# Altium PCB PCB-OEE-Test.PcbDoc
Units mm, origin at the board's own origin, x right, y up, seen from the top; angles counter-clockwise.
Board outline 152.4 x 101.6 mm, 2 copper layers (Top Layer, Bottom Layer); 56 components, 41 nets, 164 pads, 0 vias.
Unrouted connection lines stored in the file: 4.
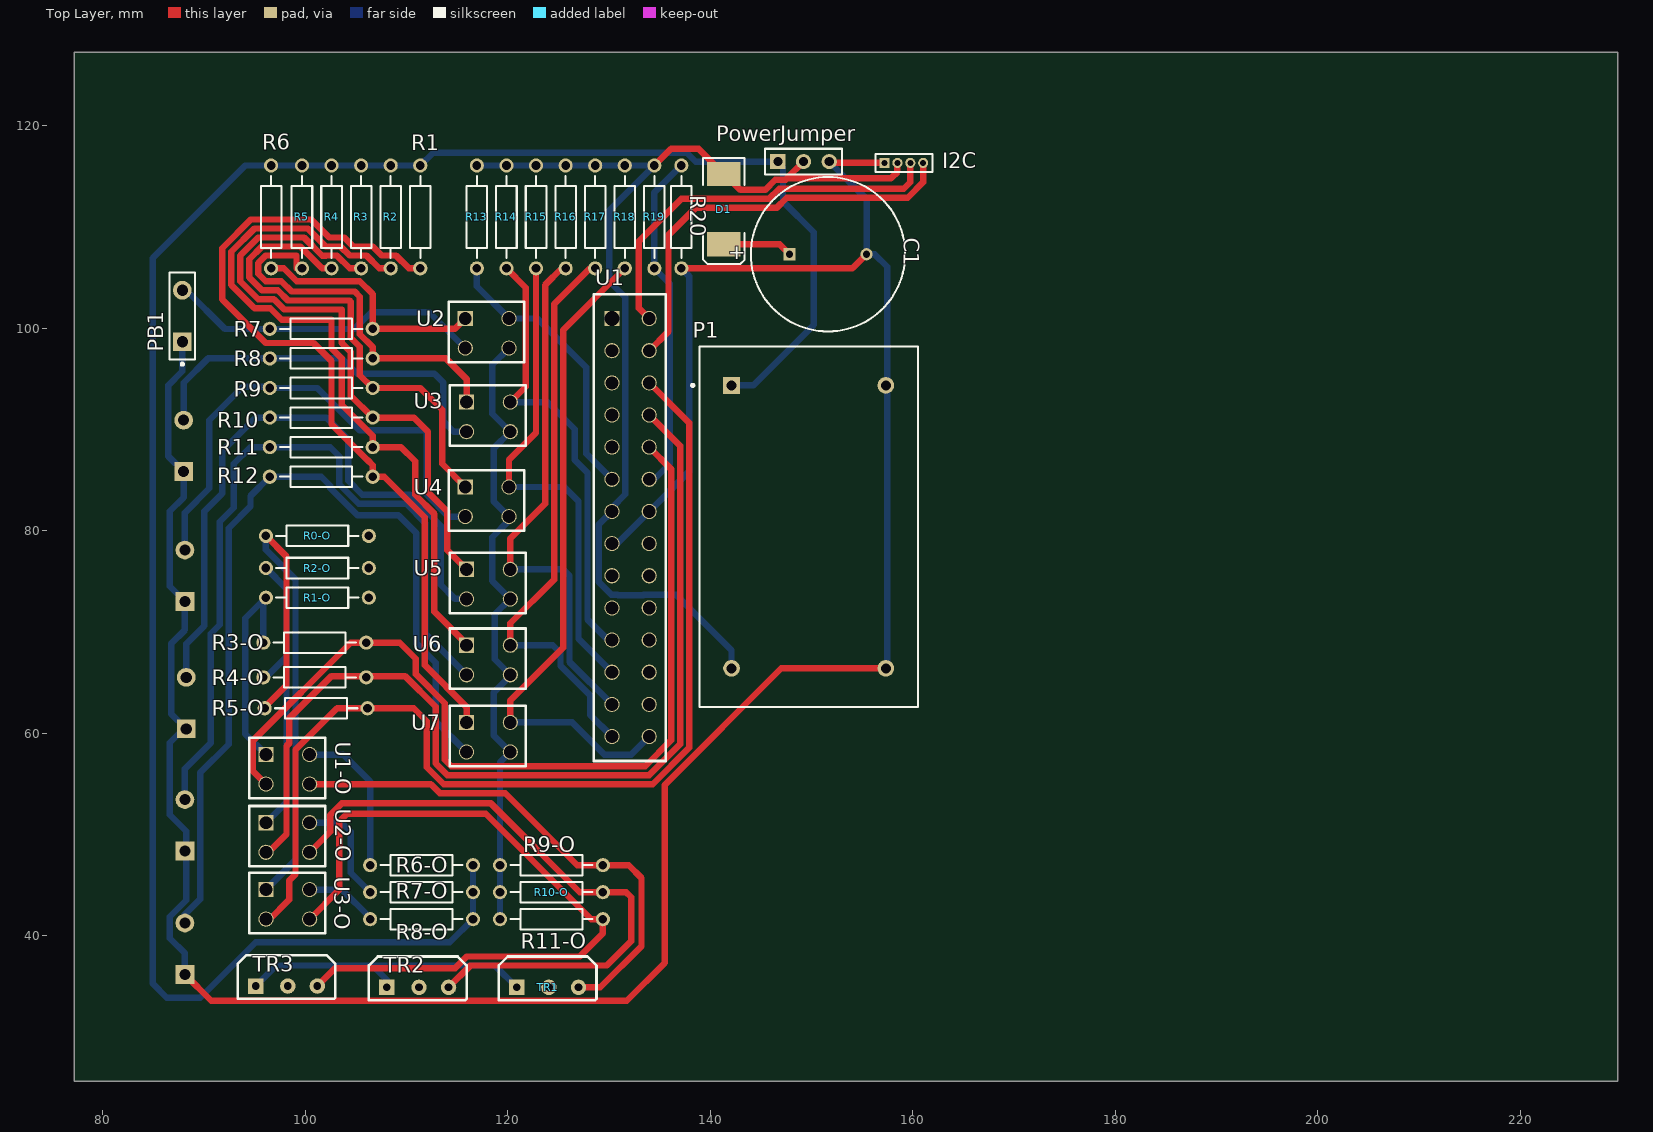
[diagram p0: Top Layer view]
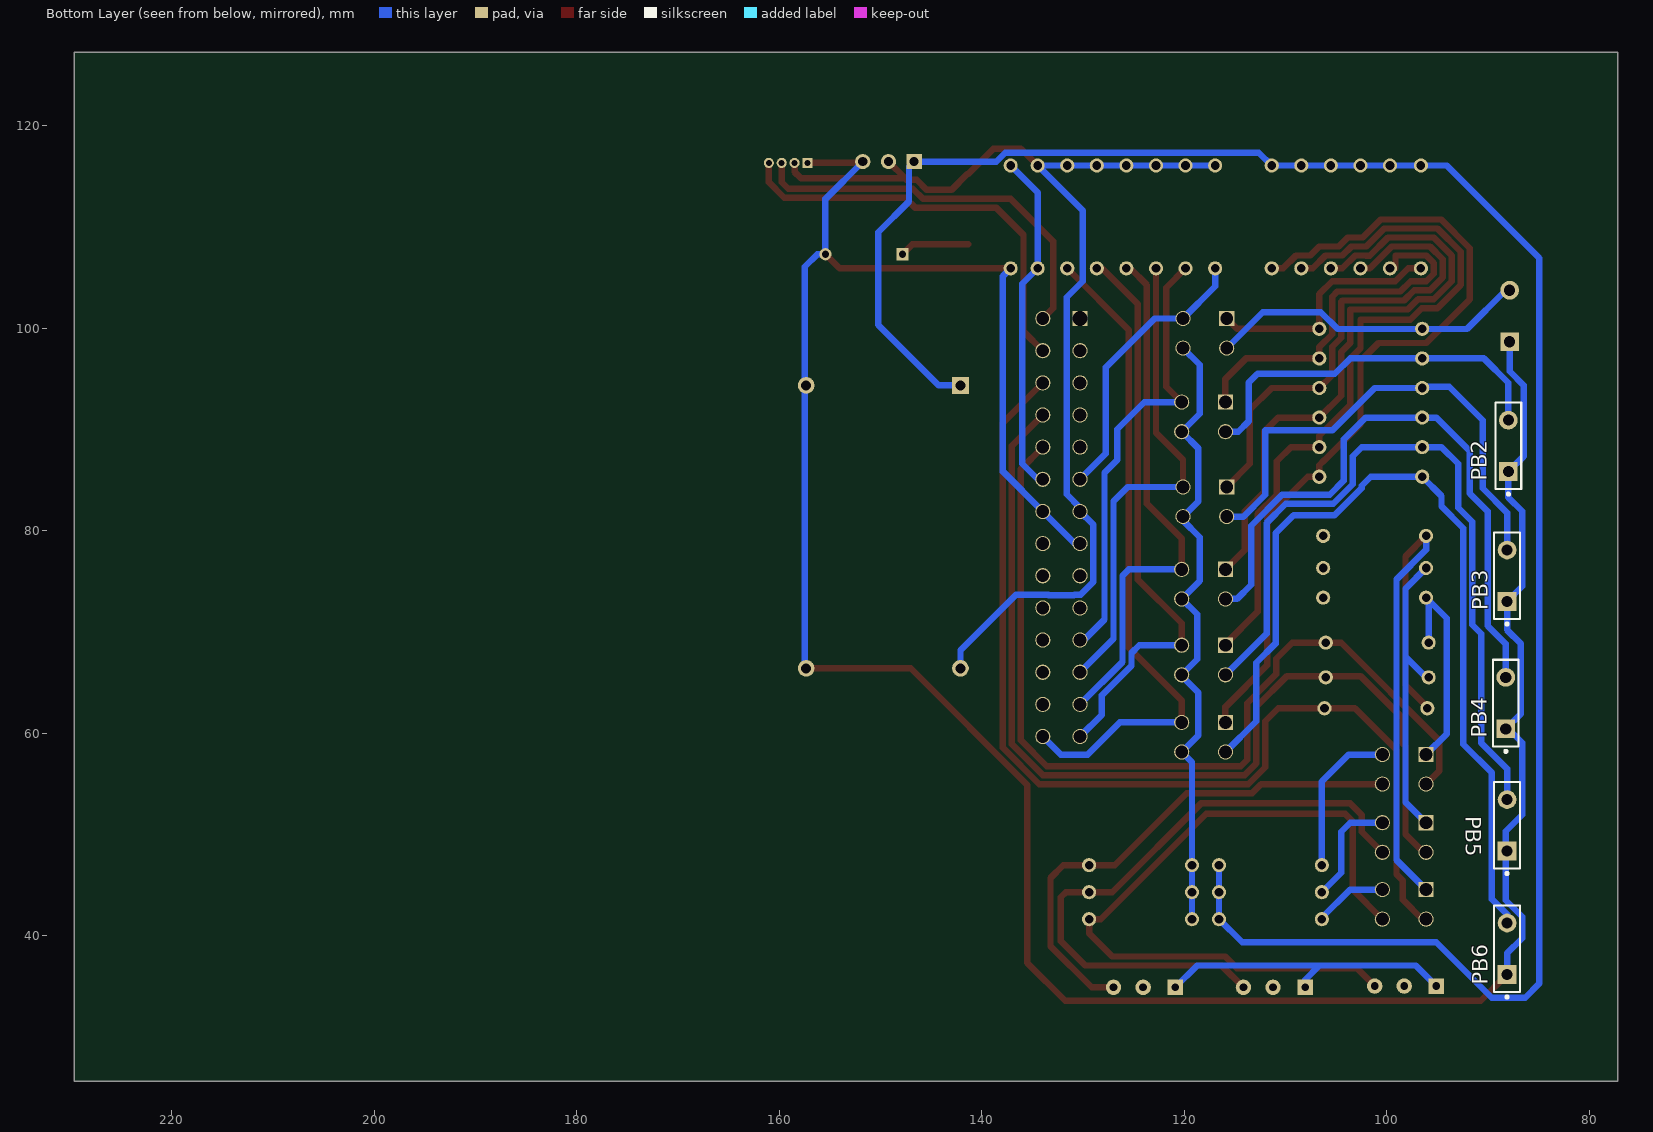
[diagram p1: Bottom Layer view, seen from below]

## Layer stack, top to bottom
Top Solder: solder mask 0.0102, Solder Resist, Dk 3.5
Top Layer: signal copper 0.0356
Dielectric 1: dielectric 0.32, FR-4, Dk 4.8
Bottom Layer: signal copper 0.0356
Bottom Solder: solder mask 0.0102, Solder Resist, Dk 3.5

## Board outline
77.216,25.654 229.616,25.654 229.616,127.254 77.216,127.254

## Design rules (kind name [scope] priority, off if disabled: settings)
Clearance [All] p1: gap=0.254
PolygonConnect [All] p1: connectstyle=Relief reliefconductorwidth=0.254 reliefentries=4 polygonreliefangle="90 Angle" airgapwidth=0.254
RoutingVias [All] p1: holewidth=0.711 width=1.27 viastyle="Through Hole" minholewidth=0.711 minwidth=1.27 maxholewidth=0.711 maxwidth=1.27
SolderMaskExpansion [All] p1: expansion=0.102
Width [All] p1: maxlimit=0.635 minlimit=0.635 preferedwidth=0.635 minimp=50.000000 maximp=50.000000 favimp=50.000000
30 further rules are at their usual default settings.

## Components (designator, comment, footprint, x,y, rotation, side; value= is the part's Value field where it differs from the comment)
C1 "p Pol1" RB7.6-15 151.638,107.315 r180 top
D1 "Diode" SMC 141.351,111.76 r270 top
I2C "LCD-I2C" MHDR1X4 157.226,116.332 r0 top (schematic designator U99)
P1 "StepDown" MODULE4 149.733,80.391 r270 top
PB1 "NG+" SPST-2 87.884,101.219 r90 top
PB2 "NG+" SPST-2 88.011,88.392 r90 bottom
PB3 "NG+" SPST-2 88.138,75.565 r90 bottom
PB4 "NG+" SPST-2 88.265,62.992 r90 bottom
PB5 "NG+" SPST-2 88.138,50.927 r90 bottom
PB6 "NG+" SPST-2 88.138,38.735 r90 bottom
PowerJumper "POWER-J" HDR1X3 146.685,116.459 r0 top (schematic designator J1)
R0-O "Res2" AXIAL-0.4 101.219,79.502 r180 top
R1 "Res2" AXIAL-0.4 111.379,110.998 r270 top
R1-O "Res2" AXIAL-0.4 101.219,73.406 r180 top
R2 "Res2" AXIAL-0.4 108.458,110.998 r270 top
R2-O "Res2" AXIAL-0.4 101.219,76.327 r180 top
R3 "Res2" AXIAL-0.4 105.537,110.998 r270 top
R3-O "Res2" AXIAL-0.4 100.965,68.961 r0 top
R4 "Res2" AXIAL-0.4 102.616,110.998 r270 top
R4-O "Res2" AXIAL-0.4 100.965,65.532 r0 top
R5 "Res2" AXIAL-0.4 99.695,110.998 r270 top
R5-O "Res2" AXIAL-0.4 101.092,62.484 r0 top
R6 "Res2" AXIAL-0.4 96.647,110.998 r270 top
R6-O "Res2" AXIAL-0.4 111.506,46.99 r0 top
R7 "Res2" AXIAL-0.4 101.6,99.949 r0 top
R7-O "Res2" AXIAL-0.4 111.506,44.323 r0 top
R8 "Res2" AXIAL-0.4 101.6,97.028 r0 top
R8-O "Res2" AXIAL-0.4 111.506,41.656 r0 top
R9 "Res2" AXIAL-0.4 101.6,94.107 r0 top
R9-O "Res2" AXIAL-0.4 124.333,46.99 r0 top
R10 "Res2" AXIAL-0.4 101.6,91.186 r0 top
R10-O "Res2" AXIAL-0.4 124.333,44.323 r0 top
R11 "Res2" AXIAL-0.4 101.6,88.265 r0 top
R11-O "Res2" AXIAL-0.4 124.333,41.656 r0 top
R12 "Res2" AXIAL-0.4 101.6,85.344 r0 top
R13 "Res2" AXIAL-0.4 116.967,110.998 r270 top
R14 "Res2" AXIAL-0.4 119.888,110.998 r270 top
R15 "Res2" AXIAL-0.4 122.809,110.998 r270 top
R16 "Res2" AXIAL-0.4 125.73,110.998 r270 top
R17 "Res2" AXIAL-0.4 128.651,110.998 r270 top
R18 "Res2" AXIAL-0.4 131.572,110.998 r270 top
R19 "Res2" AXIAL-0.4 134.493,110.998 r270 top
R20 "Res2" AXIAL-0.4 137.16,110.998 r270 top
TR1 "BD139" BD139 122.936,33.02 r0 top
TR2 "BD139" BD139 110.109,33.02 r0 top
TR3 "BD139" BD139 97.155,33.147 r0 top
U1 "ATMEGA328" at328 123.063,106.426 r270 top
U1-O "PC817" PC817 103.124,49.53 r0 top
U2 "PC817" PC817 122.809,92.583 r0 top
U2-O "PC817" PC817 103.124,42.799 r0 top
U3 "PC817" PC817 122.936,84.328 r0 top
U3-O "PC817" PC817 103.124,36.195 r0 top
U4 "PC817" PC817 122.809,75.946 r0 top
U5 "PC817" PC817 122.936,67.818 r0 top
U6 "PC817" PC817 122.936,60.325 r0 top
U7 "PC817" PC817 122.936,52.705 r0 top

## Footprints (in the part's own frame and the unit in brackets; to place one, negate y for a bottom-side part, rotate by r counter-clockwise, add the part's x,y. Pads: shape width x height; smd on the part's side, far side on the other; paste and mask are expansions set on the pad)
at328 [mil] "atmega328p"
  rect 59.06x59.06 hole 59.06: 1(215,285)
  round 59 hole 50: 2(340,285) 3(465,285) 4(590,285) 5(715,285) 6(840,285) 7(965,285) 8(1090,285) 9(1215,285) 10(1340,285) 11(1465,285) 12(1590,285) 13(1715,285) 14(1840,285) 15(1840,430) 16(1715,430) 17(1590,430) 18(1465,430) 19(1340,430) 20(1215,430) 21(1090,430) 22(965,430) 23(840,430) 24(715,430) 25(590,430) 26(465,430) 27(340,430) 28(215,430)
  silkscreen extent 120,215 1935,495
AXIAL-0.4 [mm] "Axial Device, Thru-Hole; 2 Leads; 0.4 in Pin Spacing"
  round 1.4 hole 0.85: 1(-5.08,0) 2(5.08,0)
  silkscreen extent -4.06,-1.02 4.06,1.02
BD139 [mil] "Transistor BD139"
  rect 60x60 hole 30: 1(-80,75)
  round 60 hole 30: 2(45,75) 3(160,75)
  silkscreen extent -150,25 230,195
HDR1X3 [mm] "Connector; Header; 3 Position"
  rect 1.5x1.5 hole 0.9: 1(0,0)
  round 1.5 hole 0.9: 2(2.54,0) 3(5.08,0)
  silkscreen extent -1.27,-1.27 6.35,1.27
MHDR1X4 [mm] "Connector; Header; 4 Position"
  rect 1x1 hole 0.6: 1(0,0)
  round 1 hole 0.6: 2(1.27,0) 3(2.54,0) 4(3.81,0)
  silkscreen extent -0.9,-0.9 4.71,0.9
MODULE4 [mm] "DIP; 4 Round Pins; Row Space 27.94 mm; Pitch 15.24 mm"
  rect 1.65x1.65 hole 1: 1(-13.97,-7.62)
  round 1.65 hole 1: 2(-13.97,7.62) 3(13.97,-7.62) 4(13.97,7.62)
  silkscreen extent -17.8,-11.57 17.8,10.8, body extent -17.8,-10.8 17.8,10.8, height 14
PC817 [mil] "Optocoupler PC817-4p"
  rect 59x59 hole 50: 1(-275,330)
  round 59 hole 50: 2(-275,215) 3(-105,330) 4(-105,215)
  silkscreen extent -340,160 -45,395
RB7.6-15 [mm] "Polarized Capacitor (Radial); 2 Leads"
  rect 1.2x1.2 hole 0.7: 1(3.81,0)
  round 1.2 hole 0.7: 2(-3.81,0)
  silkscreen extent -7.62,-7.62 7.62,7.62
SMC [mm] "DO-214-AB/SMC; 2 C-Bend Leads; Body 7.9 x 5.9 mm, inc. leads (LxW)"
  rect 2.4x3.3 smd: 1(-3.475,0) 2(3.475,0)
  silkscreen extent -5.07,-2.05 5.43,2.05
SPST-2 [mm] "Switch; 2 Leads"
  rect 1.85x1.85 hole 1.1: 1(-2.54,0)
  round 1.85 hole 1.1: 2(2.54,0)
  silkscreen extent -4.89,-1.27 4.28,1.27

## Part data
C1: library part "Cap Pol1", "Polarized Capacitor (Radial)"
D1: "Default Diode"
I2C: library part I2C
PB1 PB2 PB3 PB4 PB5 PB6: library part SW-PB, "Switch"
PowerJumper: library part "Header 3", "Header, 3-Pin"
R0-O R1 R1-O R2 R2-O R3 R3-O R4 R4-O R5 R5-O R6 R6-O R7 R7-O R8 R8-O R9 R9-O R10 R10-O R11 R11-O R12 R13 R14 R15 R16 R17 R18 R19 R20: "Resistor"
TR1 TR2 TR3: library part 2N3904, "NPN General Purpose Amplifier"

## Nets (pads, with @x,y where several pads share a name; then routed paths per layer and width w, separated by ;. In a path a pad name is that pad's centre, name@x,y a point inside that pad or via, vN(x,y) a via of type N, cw(c..) or ccw(c..) an arc to the next point about the centre after c; other vN are vias at no path point)
+3V3: R0-O.1 R1-O.1 R2-O.1
+5V: D1.1 I2C.2 P1.3 PowerJumper.2 R13.1 R14.1 R15.1 R16.1 R17.1 R18.1 R19.1 U1.7 | length 110.3
  Top Layer w0.635: R19.1 136.144,117.729 138.857,117.729 D1.1 141.432,115.235 143.002,113.665 145.428,113.665 146.444,114.681 147.447,114.681 147.574,114.808 ; PowerJumper.2 147.574,114.808 ; I2C.2 158.496,115.443 157.861,114.808 147.574,114.808
  Bottom Layer w0.635: R13.1 R14.1 R15.1 R16.1 R17.1 R18.1 R19.1 130.048,111.633 130.048,104.648 131.624,103.072 131.624,83.618 130.302,82.296 U1.7 128.981,80.594 128.981,74.967 130.238,73.711 130.849,73.711 130.9,73.66 133.387,73.66 133.438,73.711 136.601,73.711 142.113,68.199 P1.3
+24V: P1.1 PowerJumper.1 R1.1 R2.1 R3.1 R4.1 R5.1 R6-O.2 R6.1 R7-O.2 R8-O.2 | length 207
  Bottom Layer w0.635: R6-O.2 R7-O.2 R8-O.2 114.3,39.37 95.123,39.37 89.662,33.909 86.36,33.909 84.963,35.306 84.963,106.934 94.107,116.078 R6.1 R5.1 R4.1 R3.1 R2.1 R1.1 112.651,117.35 137.687,117.35 138.577,116.459 PowerJumper.1 147.193,115.951 147.193,112.522 150.241,109.474 150.241,100.33 144.272,94.361 P1.1
A0: R19.2 R20.1 U1.23 | length 33.9
  Bottom Layer w0.635: U1.23 134.493,85.09 136.017,86.614 136.017,104.394 R19.2 134.493,113.411 R20.1
A1: R3-O.2 U1-O.2 U1.24 | length 90.3
  Top Layer w0.635: U1-O.2 94.818,56.312 94.818,59.258 104.521,68.961 R3-O.2 109.347,68.961 110.928,67.38 110.928,65.856 113.792,62.992 113.792,57.404 114.427,56.769 133.604,56.769 136.144,59.309 136.144,86.106 U1.24
A2: R4-O.2 U1.25 U2-O.2 | length 97
  Top Layer w0.635: U2-O.2 96.393,48.26 98.171,50.038 98.171,58.751 98.425,59.005 98.425,61.468 102.616,65.659 109.868,65.659 112.903,62.624 112.903,57.036 114.059,55.88 133.972,55.88 137.033,58.941 137.033,88.392 U1.25
A3: R5-O.2 U1.26 U3-O.2 | length 103.8
  Top Layer w0.635: U3-O.2@96.342,41.656 U3-O.2 96.52,41.656 98.425,43.561 98.425,45.454 99.06,46.089 99.06,58.383 103.161,62.484 R5-O.2 110.744,62.484 112.014,61.214 112.014,56.668 113.691,54.991 134.34,54.991 137.922,58.573 137.922,90.678 U1.26
A4: I2C.4 U1.27 | length 41.4
  Top Layer w0.635: U1.27 135.888,99.693 135.888,109.218 138.557,111.887 146.558,111.887 147.574,112.903 159.499,112.903 161.036,114.44 I2C.4
A5: I2C.3 U1.28 | length 39.2
  Top Layer w0.635: U1.28 132.969,101.981 132.969,108.585 137.16,112.776 145.796,112.776 146.812,113.792 159.131,113.792 159.766,114.427 I2C.3
D4: R13.2 U1.6 U2.3 | length 28
  Bottom Layer w0.635: R13.2 116.967,104.14 U2.3 122.936,100.965 127.762,96.139 127.762,87.63 U1.6
D5: R14.2 U1.11 U3.3 | length 44.3
  Top Layer w0.635: R14.2 121.793,104.013 121.793,94.234 U3.3
  Bottom Layer w0.635: U3.3 123.952,92.71 126.619,90.043 126.619,86.995 127.889,85.725 127.889,71.247 U1.11@129.921,69.215
D6: R15.2 U1.12 U4.3 | length 48.4
  Top Layer w0.635: U4.3 120.142,87.02 122.809,89.687 R15.2
  Bottom Layer w0.635: U4.3 125.603,84.328 127,82.931 127,69.342 U1.12
D7: R16.2 U1.13 U5.3 | length 52.7
  Top Layer w0.635: U5.3 120.269,79.248 123.698,82.677 123.698,104.267 125.349,105.918 R16.2
  Bottom Layer w0.635: U5.3 125.476,76.2 126.111,75.565 126.111,67.056 U1.13
D8: R17.2 U1.14 U6.3 | length 56.6
  Top Layer w0.635: U6.3 120.269,70.866 124.587,75.184 124.587,102.362 128.143,105.918 R17.2
  Bottom Layer w0.635: U6.3 124.46,68.707 125.222,67.945 125.222,66.688 128.143,63.767 128.143,61.849 U1.14
D9: R18.2 U1.15 U7.3 | length 65.3
  Top Layer w0.635: U7.3 120.269,63.246 125.476,68.453 125.476,99.822 R18.2
  Bottom Layer w0.635: U7.3 126.365,61.087 129.54,57.912 132.207,57.912 U1.15
GND: C1.2 I2C.1 P1.2 P1.4 PB1.1 PB2.1 PB3.1 PB4.1 PB5.1 PB6.1 PowerJumper.3 R20.2 U1.8 U1.22 | length 270.8
  Top Layer w0.635: PB6.1 90.742,33.591 131.762,33.591 135.509,37.338 135.509,54.902 147.028,66.421 P1.4 ; R20.2 154.051,105.918 C1.2 ; PowerJumper.3@151.892,116.332 I2C.1
  Bottom Layer w0.635: PB1.1 87.884,95.745 86.515,94.376 86.515,87.348 PB2.1 88.011,83.299 86.642,81.93 86.642,74.521 PB3.1 88.138,70.218 86.769,68.849 86.769,61.948 PB4.1 88.011,60.452 86.642,59.083 86.642,51.971 88.265,50.347 88.265,43.518 86.642,41.895 86.642,39.779 88.138,38.282 PB6.1 ; U1.8 130.81,78.74 U1.22 137.922,85.852 137.922,105.156 R20.2 ; PowerJumper.3 155.448,112.776 C1.2 156.239,107.315 157.48,106.074 P1.4@157.48,66.675
L1: TR1.2
L2: TR2.2
L3: R9-O.1 R10-O.1 R11-O.1 TR1.1 TR2.1 TR3.1 TR3.2 U2.4 U3.4 U4.4 U5.4 U6.4 U7.4 | length 93.8
  Bottom Layer w0.635: TR3.1 97.155,37.084 106.68,37.084 ; TR2.1 108.077,35.687 106.68,37.084 ; R11-O.1 R10-O.1 R9-O.1 119.253,57.15 U7.4 118.618,59.817 118.618,64.008 120.269,65.659 U6.4 118.745,67.31 118.745,71.755 U5.4 118.491,75.057 118.491,79.375 120.142,81.026 U4.4 118.618,82.931 118.618,88.138 U3.4 118.491,91.567 118.491,96.393 U2.4 ; TR1.1 118.745,37.084 106.68,37.084
NetC1_1: C1.1 D1.2 | length 6.9
  Top Layer w0.635: D1.2 146.858,108.285 C1.1
NetPB1_2: PB1.2 R7.1 U2.2 | length 31.3
  Bottom Layer w0.635: PB1.2@88.265,103.759 92.095,99.929 104.862,99.929 106.533,101.6 112.268,101.6 U2.2
NetPB2_2: PB2.2 R8.1 U3.2 | length 37.9
  Bottom Layer w0.635: PB2.2 88.011,94.615 90.424,97.028 103.632,97.028 105.156,95.504 112.776,95.504 113.665,94.615 113.665,90.805 114.681,89.789 U3.2
NetPB3_2: PB3.2 R9.1 U4.2 | length 49.3
  Bottom Layer w0.635: PB3.2 88.138,81.788 90.551,84.201 90.551,90.932 93.853,94.234 R9.1@96.393,94.234 ; R9.1 101.216,94.107 105.408,89.914 112.016,89.914 112.016,83.564 114.173,81.407 U4.2
NetPB4_2: PB4.2 R10.1 U5.2 | length 62.5
  Bottom Layer w0.635: PB4.2 88.265,68.834 90.043,70.612 90.043,81.915 91.821,83.693 91.821,87.884 95.123,91.186 R10.1 102.108,91.186 104.267,89.027 104.267,84.963 105.664,83.566 110.363,83.566 113.411,80.518 113.411,74.676 114.808,73.279 U5.2
NetPB5_2: PB5.2 R11.1 U6.2 | length 76.2
  Bottom Layer w0.635: PB5.2 88.138,56.515 90.678,59.055 90.678,69.85 91.567,70.739 91.567,80.899 92.964,82.296 92.964,86.614 94.615,88.265 R11.1 102.489,88.265 103.378,87.376 103.378,84.595 105.296,82.677 109.982,82.677 111.887,80.772 111.887,69.85 U6.2
NetPB6_2: PB6.2 R12.1 U7.2 | length 88.1
  Bottom Layer w0.635: PB6.2 88.138,42.134 89.634,43.631 89.634,56.106 92.456,58.928 92.456,80.264 94.615,82.423 94.615,83.439 R12.1 101.6,85.344 102.489,84.455 102.489,84.227 105.182,81.534 109.22,81.534 110.998,79.756 110.998,68.871 112.903,66.966 112.903,61.214 U7.2
NetR0-O_2: R0-O.2 R5-O.1 U3-O.1 | length 56.1
  Top Layer w0.635: R5-O.1 96.012,62.598 98.171,64.757 98.171,77.47 R0-O.2
  Bottom Layer w0.635: U3-O.1 99.06,47.498 99.06,75.204 96.139,78.125 R0-O.2
NetR1-O_2: R1-O.2 R3-O.1 U1-O.1 | length 21
  Bottom Layer w0.635: R3-O.1 95.885,73.152 94.107,71.374 94.107,59.944 U1-O.1
NetR1_2: R1.2 R12.2 U7.1 | length 83
  Top Layer w0.635: R1.2 110.256,105.918 108.985,107.19 107.567,107.19 106.678,108.079 104.768,108.079 103.879,108.968 102.405,108.968 100.627,110.746 94.647,110.746 91.819,107.918 91.819,102.851 96.119,98.552 100.838,98.552 102.616,96.774 102.616,90.531 106.153,86.993 106.174,86.993 106.68,86.487 R12.2 107.823,85.344 111.817,81.35 111.817,66.745 115.951,62.611 U7.1
NetR2-O_2: R2-O.2 R4-O.1 U2-O.1 | length 29.8
  Bottom Layer w0.635: R4-O.1 96.139,65.532 98.044,67.437 ; U2-O.1 98.171,53.213 98.171,74.295 R2-O.2
NetR2_2: R2.2 R11.2 U6.1 | length 72.1
  Top Layer w0.635: R2.2 107.335,105.918 106.064,107.19 105.01,107.19 105.009,107.188 104.401,107.188 103.511,108.079 102.037,108.079 100.259,109.857 95.016,109.857 92.708,107.549 92.708,104.285 95.014,101.979 96.56,101.979 97.701,100.838 102.614,100.838 102.614,98.044 103.63,97.028 103.63,92.437 106.68,89.388 R11.2 109.474,88.265 110.871,86.868 110.871,83.566 112.776,81.661 112.776,72.009 U6.1@115.951,68.834
NetR3_2: R3.2 R10.2 U5.1 | length 60.8
  Top Layer w0.635: R3.2 104.414,105.918 103.143,107.19 102.089,107.19 102.059,107.16 101.699,107.16 99.891,108.968 95.384,108.968 93.597,107.181 93.597,104.653 95.382,102.868 96.928,102.868 97.943,101.854 103.63,101.854 103.63,98.552 104.519,97.663 104.519,93.347 R10.2 110.744,91.186 112.141,89.789 112.141,83.82 114.046,81.915 114.046,78.105 U5.1
NetR4_2: R4.2 R9.2 U4.1 | length 48.1
  Top Layer w0.635: R4.2 101.683,105.918 99.522,108.079 95.752,108.079 94.486,106.813 94.486,105.023 95.752,103.757 97.296,103.757 98.311,102.743 104.392,102.743 104.519,102.616 104.519,99.054 105.408,98.165 105.408,95.379 R9.2 111.379,94.107 113.538,91.948 113.538,86.614 U4.1
NetR5_2: R5.2 R8.2 U3.1 | length 36.9
  Top Layer w0.635: R5.2 99.154,105.918 99.154,107.19 96.12,107.19 95.375,106.445 95.375,105.391 96.12,104.646 97.665,104.646 98.679,103.632 104.904,103.632 105.408,103.127 105.408,99.422 106.68,98.151 R8.2 113.919,97.028 115.951,94.996 U3.1
NetR6-O_1: R6-O.1 U1-O.3 | length 15.3
  Bottom Layer w0.635: U1-O.3 103.759,57.912 106.426,55.245 R6-O.1
NetR6_2: R6.2 R7.2 U2.1 | length 24.1
  Top Layer w0.635: R6.2 97.897,105.918 99.168,104.646 105.412,104.646 106.68,103.378 R7.2 114.808,99.949 U2.1
NetR7-O_1: R7-O.1 U2-O.3 | length 11.2
  Bottom Layer w0.635: U2-O.3 103.632,51.181 104.521,50.292 104.521,46.228 R7-O.1
NetR8-O_1: R8-O.1 U3-O.3 | length 7.3
  Bottom Layer w0.635: U3-O.3 103.632,44.577 106.426,41.783 R8-O.1
NetR9-O_2: R9-O.2 TR1.3 U1-O.4 | length 51.2
  Top Layer w0.635: U1-O.4 112.433,54.991 113.322,54.102 119.761,54.102 126.873,46.99 R9-O.2 131.953,46.99 133.223,45.72 133.223,38.989 129.159,34.925 TR1.3
NetR10-O_2: R10-O.2 TR2.3 U2-O.4 | length 62.8
  Top Layer w0.635: U2-O.4 102.489,50.292 102.489,51.943 103.632,53.086 118.364,53.086 127.127,44.323 R10-O.2 131.699,44.323 132.207,43.815 132.207,39.497 129.794,37.084 116.332,37.084 TR2.3
NetR11-O_2: R11-O.2 TR3.3 U3-O.4 | length 73.3
  Top Layer w0.635: U3-O.4 103.378,44.577 103.378,51.308 104.14,52.07 117.856,52.07 128.27,41.656 R11-O.2 129.413,40.259 127.127,37.973 115.964,37.973 114.821,36.83 102.997,36.83 TR3.3
pads on no net: U1.1 U1.2 U1.3 U1.4 U1.5 U1.9 U1.10 U1.16 U1.17 U1.18 U1.19 U1.20 U1.21

## Silkscreen, mask and mechanical layers (free items; w line width, h text height)
Mechanical 1:
  region: 169.545,121.602 92.202,121.602 80.772,110.172 80.772,29.464 139.192,29.464 169.545,29.464

## Panel: embedded boards
"" at 120.015,66.04, 1 rows x 1 columns, spacing 63.5 x 38.1, rotation 0

## Text inside footprints (layer, text, board x,y; h text height)
C1: Top Overlay "+" at 143.506,108.052 h1.5 r180